# Altium PCB 1_ir-tara-f.PcbDoc (part 8 of 8)
Units mm, origin at the board's own origin, x right, y up, seen from the top; angles counter-clockwise.
Board outline 151 x 86.38 mm, 2 copper layers (Top Layer, Bottom Layer); 728 components, 20 nets, 2100 pads, 0 vias.
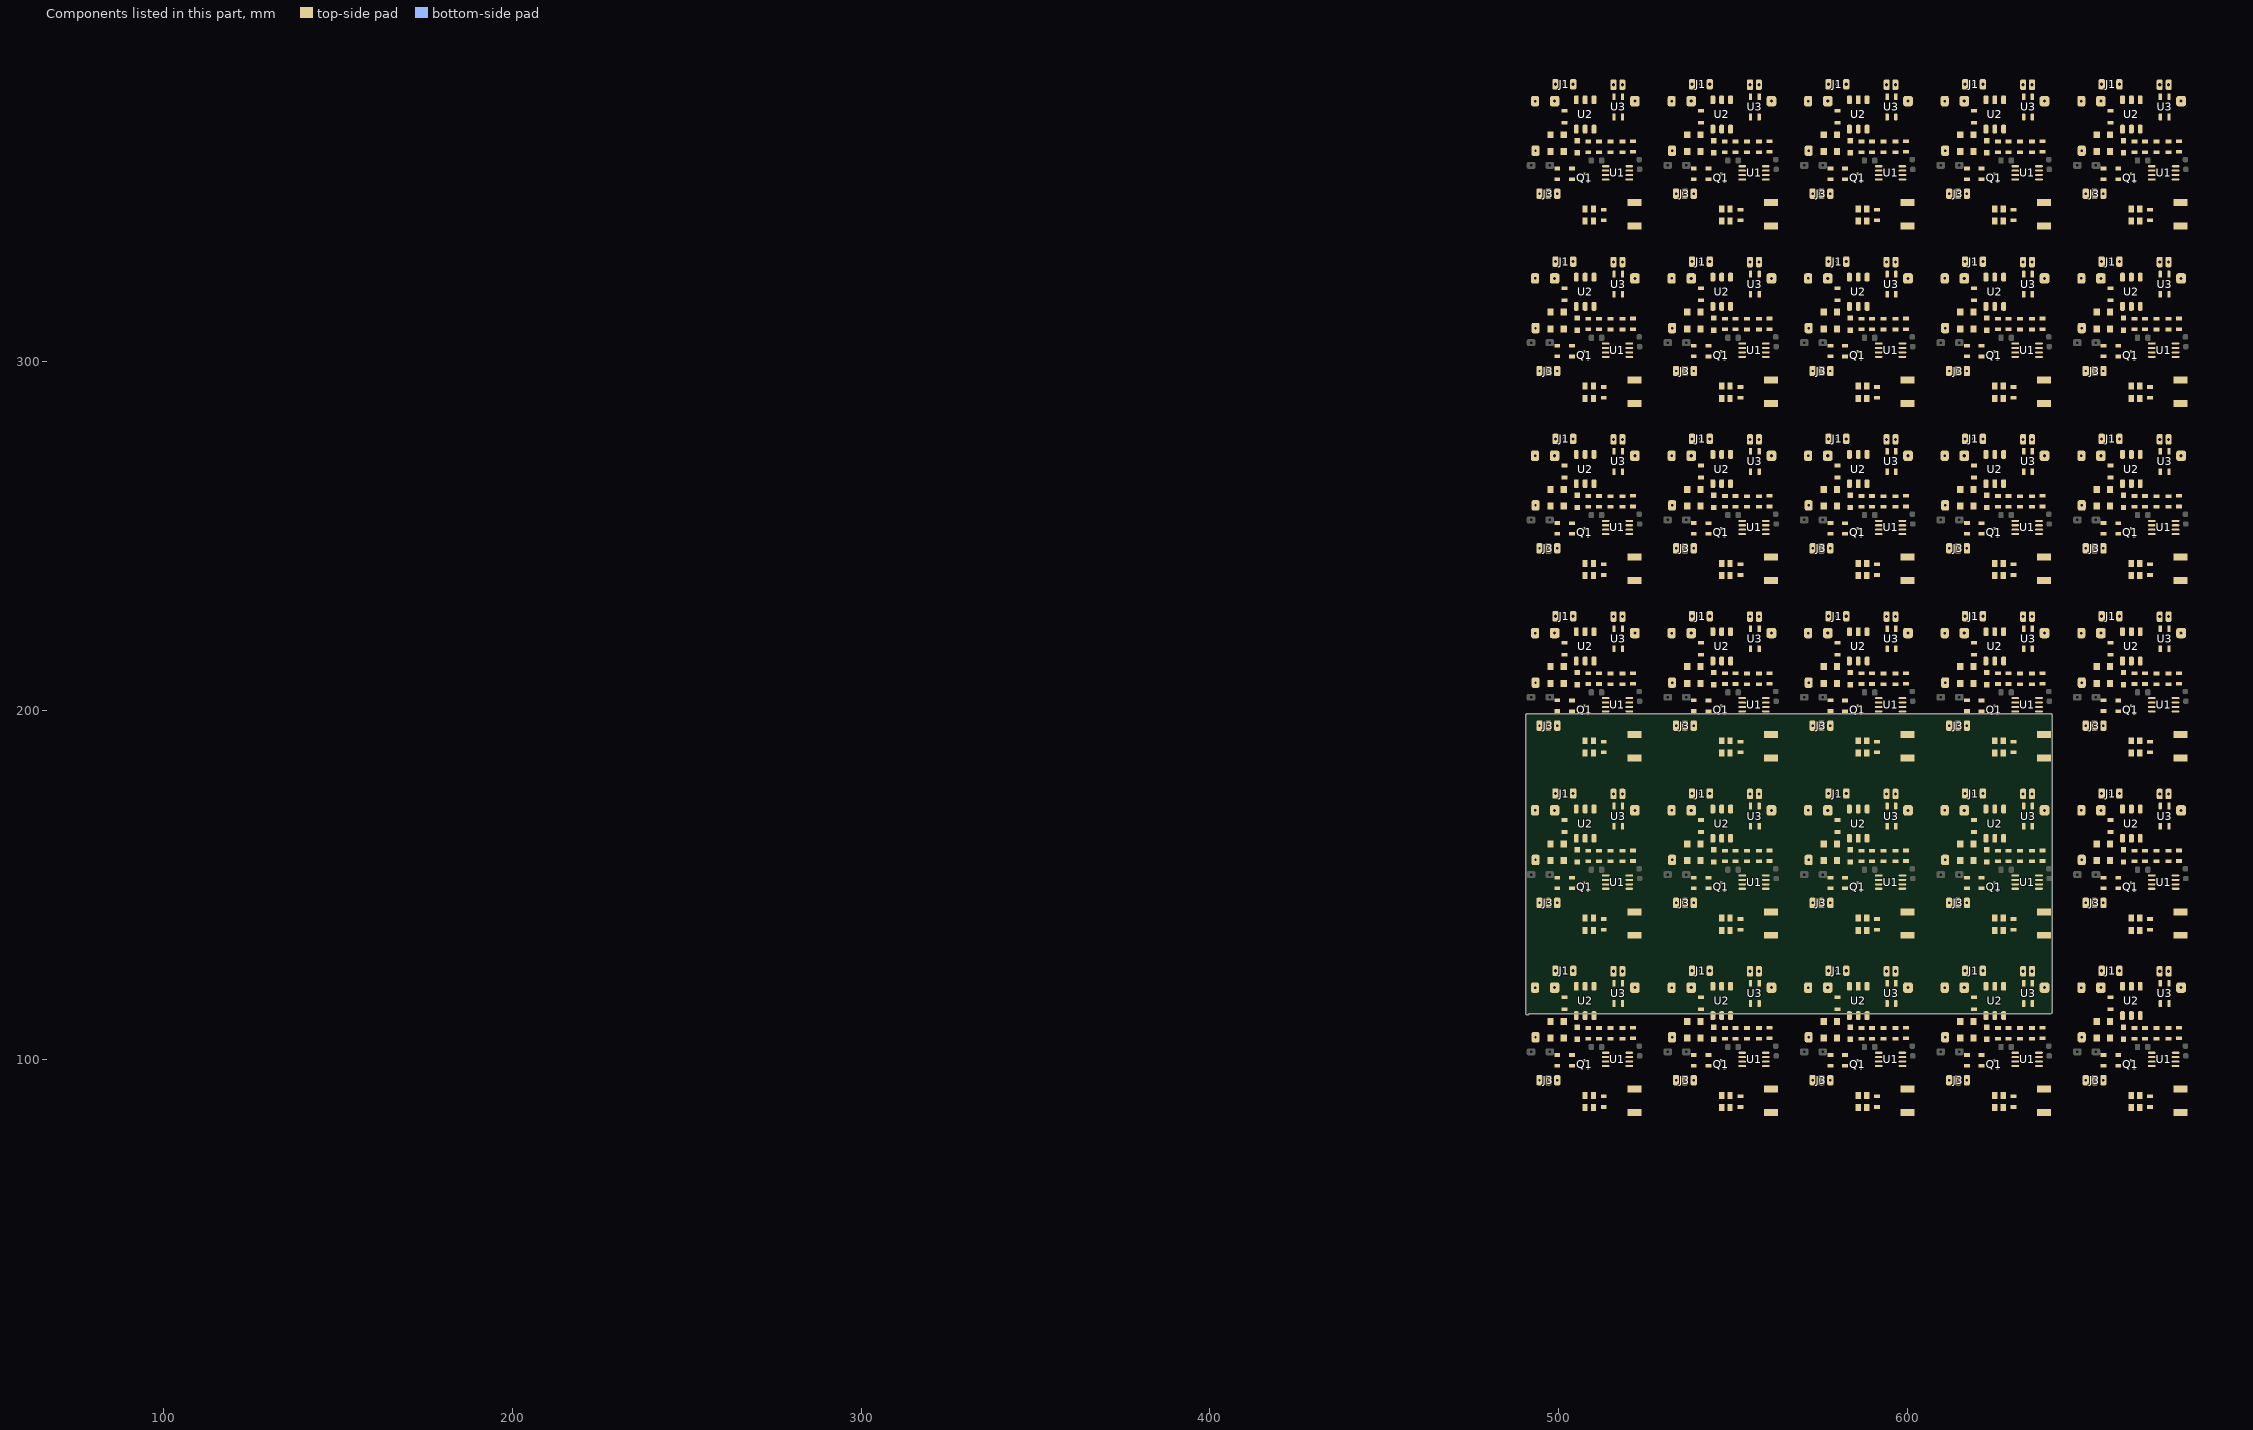
[diagram p8: the components of this part, seen from the top]

## Keep-outs
Keep-Out Layer:
  lines w0.3: 489.173,82.742 489.173,79.821 492.094,79.821 ; 489.173,127.192 489.173,130.113 492.094,130.113 ; 489.173,133.58 489.173,130.659 492.094,130.659 ; 489.173,178.03 489.173,180.951 492.094,180.951 ; 489.173,184.419 489.173,181.498 492.094,181.498 ; 489.173,228.869 489.173,231.79 492.094,231.79 ; 489.173,235.258 489.173,232.337 492.094,232.337 ; 489.173,279.708 489.173,282.629 492.094,282.629 ; 489.173,286.096 489.173,283.175 492.094,283.175 ; 489.173,330.546 489.173,333.467 492.094,333.467 ; 489.173,336.935 489.173,334.014 492.094,334.014 ; 489.173,381.385 489.173,384.306 492.094,384.306 ; 524.86,79.821 527.781,79.821 527.781,82.742 ; 524.86,384.306 527.781,384.306 527.781,381.385 ; 528.327,82.742 528.327,79.821 531.248,79.821 ; 528.327,381.385 528.327,384.306 531.248,384.306 ; 564.014,79.821 566.935,79.821 566.935,82.742 ; 564.014,384.306 566.935,384.306 566.935,381.385 ; 567.482,82.742 567.482,79.821 570.403,79.821 ; 567.482,381.385 567.482,384.306 570.403,384.306 ; 603.169,79.821 606.09,79.821 606.09,82.742 ; 603.169,384.306 606.09,384.306 606.09,381.385 ; 606.637,82.742 606.637,79.821 609.558,79.821 ; 606.637,381.385 606.637,384.306 609.558,384.306 ; 642.324,79.821 645.245,79.821 645.245,82.742 ; 642.324,384.306 645.245,384.306 645.245,381.385 ; 645.791,82.742 645.791,79.821 648.712,79.821 ; 645.791,381.385 645.791,384.306 648.712,384.306 ; 681.478,79.821 684.399,79.821 684.399,82.742 ; 681.478,130.113 684.399,130.113 684.399,127.192 ; 681.478,130.659 684.399,130.659 684.399,133.58 ; 681.478,180.951 684.399,180.951 684.399,178.03 ; 681.478,181.498 684.399,181.498 684.399,184.419 ; 681.478,231.79 684.399,231.79 684.399,228.869 ; 681.478,232.337 684.399,232.337 684.399,235.258 ; 681.478,282.629 684.399,282.629 684.399,279.708 ; 681.478,283.175 684.399,283.175 684.399,286.096 ; 681.478,333.467 684.399,333.467 684.399,330.546 ; 681.478,334.014 684.399,334.014 684.399,336.935 ; 681.478,384.306 684.399,384.306 684.399,381.385
  text "CHAHARDOLI-20 SERI-GHERMEZ TOP----MESHKI BOT VA GHETE BOT" at 560.272,385.545 h1.4
  text "CHAHARDOLI-20 SERI-GHERMEZ TOP----MESHKI BOT VA GHETE BOT" at 486.877,281.827 h1.4 r270
  text "CHAHARDOLI-20 SERI-GHERMEZ TOP----MESHKI BOT VA GHETE BOT" at 552.896,77.669 h1.4

## Other copper
Top Layer:
  pour cut-out: 598.47,345.063 601.645,345.063 601.645,339.602 601.518,339.729 598.47,339.729
  region: 575.991,360.339 577.805,358.525 579.42,358.525 579.547,358.398 578.277,357.128 578.277,355.604 577.896,355.223 577.769,355.35 574.213,355.35 574.213,357.509 572.435,359.287 572.435,360.297
  region: 615.146,360.339 616.96,358.525 618.575,358.525 618.702,358.398 617.432,357.128 617.432,355.604 617.051,355.223 616.924,355.35 613.368,355.35 613.368,357.509 611.59,359.287 611.59,360.297
  pour cut-out: 637.625,345.063 640.8,345.063 640.8,339.602 640.673,339.729 637.625,339.729
  region: 536.836,360.339 538.65,358.525 540.265,358.525 540.392,358.398 539.122,357.128 539.122,355.604 538.741,355.223 538.614,355.35 535.058,355.35 535.058,357.509 533.28,359.287 533.28,360.297
  pour cut-out: 559.315,345.063 562.49,345.063 562.49,339.602 562.363,339.729 559.315,339.729
  region: 497.682,360.339 499.496,358.525 501.111,358.525 501.238,358.398 499.968,357.128 499.968,355.604 499.587,355.223 499.46,355.35 495.904,355.35 495.904,357.509 494.126,359.287 494.126,360.297
  pour cut-out: 520.161,345.063 523.336,345.063 523.336,339.602 523.209,339.729 520.161,339.729
  region: 654.3,360.339 656.114,358.525 657.729,358.525 657.856,358.398 656.586,357.128 656.586,355.604 656.205,355.223 656.078,355.35 652.522,355.35 652.522,357.509 650.744,359.287 650.744,360.297
  pour cut-out: 676.779,345.063 679.954,345.063 679.954,339.602 679.827,339.729 676.779,339.729
  pour cut-out: 598.47,294.224 601.645,294.224 601.645,288.763 601.518,288.89 598.47,288.89
  region: 575.991,309.5 577.805,307.686 579.42,307.686 579.547,307.559 578.277,306.289 578.277,304.765 577.896,304.384 577.769,304.511 574.213,304.511 574.213,306.67 572.435,308.448 572.435,309.458
  region: 615.146,309.5 616.96,307.686 618.575,307.686 618.702,307.559 617.432,306.289 617.432,304.765 617.051,304.384 616.924,304.511 613.368,304.511 613.368,306.67 611.59,308.448 611.59,309.458
  pour cut-out: 637.625,294.224 640.8,294.224 640.8,288.763 640.673,288.89 637.625,288.89
  region: 536.836,309.5 538.65,307.686 540.265,307.686 540.392,307.559 539.122,306.289 539.122,304.765 538.741,304.384 538.614,304.511 535.058,304.511 535.058,306.67 533.28,308.448 533.28,309.458
  pour cut-out: 559.315,294.224 562.49,294.224 562.49,288.763 562.363,288.89 559.315,288.89
  region: 497.682,309.5 499.496,307.686 501.111,307.686 501.238,307.559 499.968,306.289 499.968,304.765 499.587,304.384 499.46,304.511 495.904,304.511 495.904,306.67 494.126,308.448 494.126,309.458
  pour cut-out: 520.161,294.224 523.336,294.224 523.336,288.763 523.209,288.89 520.161,288.89
  region: 654.3,309.5 656.114,307.686 657.729,307.686 657.856,307.559 656.586,306.289 656.586,304.765 656.205,304.384 656.078,304.511 652.522,304.511 652.522,306.67 650.744,308.448 650.744,309.458
  pour cut-out: 676.779,294.224 679.954,294.224 679.954,288.763 679.827,288.89 676.779,288.89
  pour cut-out: 598.47,243.386 601.645,243.386 601.645,237.925 601.518,238.052 598.47,238.052
  region: 575.991,258.662 577.805,256.848 579.42,256.848 579.547,256.721 578.277,255.451 578.277,253.927 577.896,253.546 577.769,253.673 574.213,253.673 574.213,255.832 572.435,257.61 572.435,258.62
  region: 615.146,258.662 616.96,256.848 618.575,256.848 618.702,256.721 617.432,255.451 617.432,253.927 617.051,253.546 616.924,253.673 613.368,253.673 613.368,255.832 611.59,257.61 611.59,258.62
  pour cut-out: 637.625,243.386 640.8,243.386 640.8,237.925 640.673,238.052 637.625,238.052
  region: 536.836,258.662 538.65,256.848 540.265,256.848 540.392,256.721 539.122,255.451 539.122,253.927 538.741,253.546 538.614,253.673 535.058,253.673 535.058,255.832 533.28,257.61 533.28,258.62
  pour cut-out: 559.315,243.386 562.49,243.386 562.49,237.925 562.363,238.052 559.315,238.052
  region: 497.682,258.662 499.496,256.848 501.111,256.848 501.238,256.721 499.968,255.451 499.968,253.927 499.587,253.546 499.46,253.673 495.904,253.673 495.904,255.832 494.126,257.61 494.126,258.62
  pour cut-out: 520.161,243.386 523.336,243.386 523.336,237.925 523.209,238.052 520.161,238.052
  region: 654.3,258.662 656.114,256.848 657.729,256.848 657.856,256.721 656.586,255.451 656.586,253.927 656.205,253.546 656.078,253.673 652.522,253.673 652.522,255.832 650.744,257.61 650.744,258.62
  pour cut-out: 676.779,243.386 679.954,243.386 679.954,237.925 679.827,238.052 676.779,238.052
  pour cut-out: 598.47,90.87 601.645,90.87 601.645,85.409 601.518,85.536 598.47,85.536
  region: 575.991,106.146 577.805,104.332 579.42,104.332 579.547,104.205 578.277,102.935 578.277,101.411 577.896,101.03 577.769,101.157 574.213,101.157 574.213,103.316 572.435,105.094 572.435,106.104
  region: 615.146,106.146 616.96,104.332 618.575,104.332 618.702,104.205 617.432,102.935 617.432,101.411 617.051,101.03 616.924,101.157 613.368,101.157 613.368,103.316 611.59,105.094 611.59,106.104
  pour cut-out: 637.625,90.87 640.8,90.87 640.8,85.409 640.673,85.536 637.625,85.536
  region: 536.836,106.146 538.65,104.332 540.265,104.332 540.392,104.205 539.122,102.935 539.122,101.411 538.741,101.03 538.614,101.157 535.058,101.157 535.058,103.316 533.28,105.094 533.28,106.104
  pour cut-out: 559.315,90.87 562.49,90.87 562.49,85.409 562.363,85.536 559.315,85.536
  region: 497.682,106.146 499.496,104.332 501.111,104.332 501.238,104.205 499.968,102.935 499.968,101.411 499.587,101.03 499.46,101.157 495.904,101.157 495.904,103.316 494.126,105.094 494.126,106.104
  pour cut-out: 520.161,90.87 523.336,90.87 523.336,85.409 523.209,85.536 520.161,85.536
  region: 654.3,106.146 656.114,104.332 657.729,104.332 657.856,104.205 656.586,102.935 656.586,101.411 656.205,101.03 656.078,101.157 652.522,101.157 652.522,103.316 650.744,105.094 650.744,106.104
  pour cut-out: 676.779,90.87 679.954,90.87 679.954,85.409 679.827,85.536 676.779,85.536
  pour cut-out: 598.47,192.547 601.645,192.547 601.645,187.086 601.518,187.213 598.47,187.213
  region: 575.991,207.823 577.805,206.009 579.42,206.009 579.547,205.882 578.277,204.612 578.277,203.088 577.896,202.707 577.769,202.834 574.213,202.834 574.213,204.993 572.435,206.771 572.435,207.781
  region: 615.146,207.823 616.96,206.009 618.575,206.009 618.702,205.882 617.432,204.612 617.432,203.088 617.051,202.707 616.924,202.834 613.368,202.834 613.368,204.993 611.59,206.771 611.59,207.781
  pour cut-out: 637.625,192.547 640.8,192.547 640.8,187.086 640.673,187.213 637.625,187.213
  region: 536.836,207.823 538.65,206.009 540.265,206.009 540.392,205.882 539.122,204.612 539.122,203.088 538.741,202.707 538.614,202.834 535.058,202.834 535.058,204.993 533.28,206.771 533.28,207.781
  pour cut-out: 559.315,192.547 562.49,192.547 562.49,187.086 562.363,187.213 559.315,187.213
  region: 497.682,207.823 499.496,206.009 501.111,206.009 501.238,205.882 499.968,204.612 499.968,203.088 499.587,202.707 499.46,202.834 495.904,202.834 495.904,204.993 494.126,206.771 494.126,207.781
  pour cut-out: 520.161,192.547 523.336,192.547 523.336,187.086 523.209,187.213 520.161,187.213
  region: 654.3,207.823 656.114,206.009 657.729,206.009 657.856,205.882 656.586,204.612 656.586,203.088 656.205,202.707 656.078,202.834 652.522,202.834 652.522,204.993 650.744,206.771 650.744,207.781
  pour cut-out: 676.779,192.547 679.954,192.547 679.954,187.086 679.827,187.213 676.779,187.213
  pour cut-out: 676.779,141.708 679.954,141.708 679.954,136.247 679.827,136.374 676.779,136.374
  region: 654.3,156.984 656.114,155.17 657.729,155.17 657.856,155.043 656.586,153.773 656.586,152.249 656.205,151.868 656.078,151.995 652.522,151.995 652.522,154.154 650.744,155.932 650.744,156.942
  pour cut-out: 520.161,141.708 523.336,141.708 523.336,136.247 523.209,136.374 520.161,136.374
  region: 497.682,156.984 499.496,155.17 501.111,155.17 501.238,155.043 499.968,153.773 499.968,152.249 499.587,151.868 499.46,151.995 495.904,151.995 495.904,154.154 494.126,155.932 494.126,156.942
  pour cut-out: 559.315,141.708 562.49,141.708 562.49,136.247 562.363,136.374 559.315,136.374
  region: 536.836,156.984 538.65,155.17 540.265,155.17 540.392,155.043 539.122,153.773 539.122,152.249 538.741,151.868 538.614,151.995 535.058,151.995 535.058,154.154 533.28,155.932 533.28,156.942
  pour cut-out: 637.625,141.708 640.8,141.708 640.8,136.247 640.673,136.374 637.625,136.374
  region: 615.146,156.984 616.96,155.17 618.575,155.17 618.702,155.043 617.432,153.773 617.432,152.249 617.051,151.868 616.924,151.995 613.368,151.995 613.368,154.154 611.59,155.932 611.59,156.942
  region net vcc: 575.991,156.984 577.805,155.17 579.42,155.17 579.547,155.043 578.277,153.773 578.277,152.249 577.896,151.868 577.769,151.995 574.213,151.995 574.213,154.154 572.435,155.932 572.435,156.942
  pour cut-out: 598.47,141.708 601.645,141.708 601.645,136.247 601.518,136.374 598.47,136.374
  text "T16505" at 640.815,386.046 h1.4
  text "T16505" at 529.539,385.727 h1.4
  text "Smart_Sperlus" at 526.13,366.78 h1.3 r90
  text "Smart_Sperlus" at 565.284,366.78 h1.3 r90
  text "Smart_Sperlus" at 604.439,366.78 h1.3 r90
  text "Smart_Sperlus" at 643.594,366.78 h1.3 r90
  text "Smart_Sperlus" at 682.748,366.78 h1.3 r90
  text "Smart_Sperlus" at 526.13,315.941 h1.3 r90
  text "Smart_Sperlus" at 565.284,315.941 h1.3 r90
  text "Smart_Sperlus" at 604.439,315.941 h1.3 r90
  text "Smart_Sperlus" at 643.594,315.941 h1.3 r90
  text "Smart_Sperlus" at 682.748,315.941 h1.3 r90
  text "Smart_Sperlus" at 526.13,265.103 h1.3 r90
  text "Smart_Sperlus" at 565.284,265.103 h1.3 r90
  text "Smart_Sperlus" at 604.439,265.103 h1.3 r90
  text "Smart_Sperlus" at 643.594,265.103 h1.3 r90
  text "Smart_Sperlus" at 682.748,265.103 h1.3 r90
  text "Smart_Sperlus" at 526.13,214.264 h1.3 r90
  text "Smart_Sperlus" at 565.284,214.264 h1.3 r90
  text "Smart_Sperlus" at 604.439,214.264 h1.3 r90
  text "Smart_Sperlus" at 643.594,214.264 h1.3 r90
  text "Smart_Sperlus" at 682.748,214.264 h1.3 r90
  text "Smart_Sperlus" at 526.13,163.425 h1.3 r90
  text "Smart_Sperlus" at 565.284,163.425 h1.3 r90
  text "Smart_Sperlus" at 604.439,163.425 h1.3 r90
  text "Smart_Sperlus" at 643.594,163.425 h1.3 r90
  text "Smart_Sperlus" at 682.748,163.425 h1.3 r90
  text "Smart_Sperlus" at 526.13,112.587 h1.3 r90
  text "Smart_Sperlus" at 565.284,112.587 h1.3 r90
  text "Smart_Sperlus" at 604.439,112.587 h1.3 r90
  text "Smart_Sperlus" at 643.594,112.587 h1.3 r90
  text "Smart_Sperlus" at 682.748,112.587 h1.3 r90
Multi-Layer:
  lines w0.3: 483.684,384.616 488.734,384.616 ; 483.876,79.627 488.926,79.627 ; 488.834,384.566 488.834,389.616 ; 488.876,74.477 488.876,79.527 ; 684.638,384.566 689.688,384.566 ; 684.688,384.666 684.688,389.716 ; 684.752,74.486 684.752,79.536 ; 684.852,79.486 689.902,79.486

## Silkscreen, mask and mechanical layers (free items; w line width, h text height)
Bottom Overlay:
  text "CHAHARDOLI-20 SERI-GHERMEZ TOP----MESHKI BOT VA GHETE BOT" at 624.105,385.545 h1.4
Top Solder:
  rectangle: 602.534,363.605 605.328,383.417
  rectangle: 641.689,363.605 644.483,383.417
  rectangle: 563.379,363.605 566.173,383.417
  rectangle: 524.225,363.605 527.019,383.417
  rectangle: 680.843,363.605 683.637,383.417
  rectangle: 602.534,312.766 605.328,332.578
  rectangle: 641.689,312.766 644.483,332.578
  rectangle: 563.379,312.766 566.173,332.578
  rectangle: 524.225,312.766 527.019,332.578
  rectangle: 680.843,312.766 683.637,332.578
  rectangle: 602.534,261.928 605.328,281.74
  rectangle: 641.689,261.928 644.483,281.74
  rectangle: 563.379,261.928 566.173,281.74
  rectangle: 524.225,261.928 527.019,281.74
  rectangle: 680.843,261.928 683.637,281.74
  rectangle: 602.534,109.412 605.328,129.224
  rectangle: 641.689,109.412 644.483,129.224
  rectangle: 563.379,109.412 566.173,129.224
  rectangle: 524.225,109.412 527.019,129.224
  rectangle: 680.843,109.412 683.637,129.224
  rectangle: 602.534,211.089 605.328,230.901
  rectangle: 641.689,211.089 644.483,230.901
  rectangle: 563.379,211.089 566.173,230.901
  rectangle: 524.225,211.089 527.019,230.901
  rectangle: 680.843,211.089 683.637,230.901
  rectangle: 680.843,160.25 683.637,180.062
  rectangle: 524.225,160.25 527.019,180.062
  rectangle: 563.379,160.25 566.173,180.062
  rectangle: 641.689,160.25 644.483,180.062
  rectangle: 602.534,160.25 605.328,180.062
  lines w0.254: 524.352,109.539 526.892,109.539 526.892,129.097 524.352,129.097 524.352,109.539 ; 524.352,160.377 524.352,179.935 526.892,179.935 526.892,160.377 524.352,160.377 ; 524.352,211.216 526.892,211.216 526.892,230.774 524.352,230.774 524.352,211.216 ; 524.352,262.055 526.892,262.055 526.892,281.613 524.352,281.613 524.352,262.055 ; 524.352,312.893 526.892,312.893 526.892,332.451 524.352,332.451 524.352,312.893 ; 524.352,363.732 526.892,363.732 526.892,383.29 524.352,383.29 524.352,363.732 ; 563.506,109.539 566.046,109.539 566.046,129.097 563.506,129.097 563.506,109.539 ; 563.506,160.377 563.506,179.935 566.046,179.935 566.046,160.377 563.506,160.377 ; 563.506,211.216 566.046,211.216 566.046,230.774 563.506,230.774 563.506,211.216 ; 563.506,262.055 566.046,262.055 566.046,281.613 563.506,281.613 563.506,262.055 ; 563.506,312.893 566.046,312.893 566.046,332.451 563.506,332.451 563.506,312.893 ; 563.506,363.732 566.046,363.732 566.046,383.29 563.506,383.29 563.506,363.732 ; 602.661,109.539 602.661,129.097 605.201,129.097 605.201,109.539 602.661,109.539 ; 602.661,160.377 605.201,160.377 605.201,179.935 602.661,179.935 602.661,160.377 ; 602.661,211.216 602.661,230.774 605.201,230.774 605.201,211.216 602.661,211.216 ; 602.661,262.055 602.661,281.613 605.201,281.613 605.201,262.055 602.661,262.055 ; 602.661,312.893 602.661,332.451 605.201,332.451 605.201,312.893 602.661,312.893 ; 602.661,363.732 602.661,383.29 605.201,383.29 605.201,363.732 602.661,363.732 ; 641.816,109.539 644.356,109.539 644.356,129.097 641.816,129.097 641.816,109.539 ; 641.816,160.377 641.816,179.935 644.356,179.935 644.356,160.377 641.816,160.377 ; 641.816,211.216 644.356,211.216 644.356,230.774 641.816,230.774 641.816,211.216 ; 641.816,262.055 644.356,262.055 644.356,281.613 641.816,281.613 641.816,262.055 ; 641.816,312.893 644.356,312.893 644.356,332.451 641.816,332.451 641.816,312.893 ; 641.816,363.732 644.356,363.732 644.356,383.29 641.816,383.29 641.816,363.732 ; 680.97,109.539 683.51,109.539 683.51,129.097 680.97,129.097 680.97,109.539 ; 680.97,160.377 680.97,179.935 683.51,179.935 683.51,160.377 680.97,160.377 ; 680.97,211.216 683.51,211.216 683.51,230.774 680.97,230.774 680.97,211.216 ; 680.97,262.055 683.51,262.055 683.51,281.613 680.97,281.613 680.97,262.055 ; 680.97,312.893 683.51,312.893 683.51,332.451 680.97,332.451 680.97,312.893 ; 680.97,363.732 683.51,363.732 683.51,383.29 680.97,383.29 680.97,363.732
  text "TOP" at 650.513,385.966 h2.5
  text "TOP" at 487.434,350.441 h2.5 r90
  text "TOP" at 686.152,113.661 h2.5 r270
  text "TOP" at 523.051,78.227 h2.5 r180
Bottom Solder:
  text "BOT" at 524.309,386.216 h2.5
  text "BOT" at 686.288,349.091 h2.5 r270
  text "BOT" at 487.276,115.102 h2.5 r90
  text "BOT" at 649.277,77.886 h2.5 r180

## Text inside footprints (layer, text, board x,y; h text height)
Designator95_2: Top Layer "TOPR" at 489.212,385.749 h2.5; Bottom Layer "BOTR" at 507.512,388.849 h2.5 r180
Designator95_2: Top Layer "TOP" at 484.867,384.238 h3 r270; Bottom Layer "BOT" at 487.967,365.938 h3 r90
Designator95_2: Top Layer "TOPR" at 685.821,384.188 h2.5 r270; Bottom Layer "BOTR" at 688.921,365.888 h2.5 r90
Designator95_2: Top Layer "TOP" at 684.31,388.533 h3 r180; Bottom Layer "BOT" at 666.01,385.433 h3
Designator95_2: Top Layer "TOPR" at 684.374,78.353 h2.5 r180; Bottom Layer "BOTR" at 666.074,75.253 h2.5
Designator95_2: Top Layer "TOP" at 688.719,79.864 h3 r90; Bottom Layer "BOT" at 685.619,98.164 h3 r270
Designator95_2: Top Layer "TOPR" at 487.743,80.005 h2.5 r90; Bottom Layer "BOTR" at 484.643,98.305 h2.5 r270
Designator95_2: Top Layer "TOP" at 489.254,75.66 h3; Bottom Layer "BOT" at 507.554,78.76 h3 r180
U3: Top Overlay "-" at 594.022,374.529 h0.81 r270; Top Overlay "+" at 596.312,374.529 h0.81 r270
U3: Top Overlay "+" at 635.467,374.529 h0.81 r270; Top Overlay "-" at 633.177,374.529 h0.81 r270
U3: Top Overlay "-" at 554.868,374.529 h0.81 r270; Top Overlay "+" at 557.158,374.529 h0.81 r270
U3: Top Overlay "-" at 515.713,374.529 h0.81 r270; Top Overlay "+" at 518.003,374.529 h0.81 r270
U3: Top Overlay "-" at 672.332,374.529 h0.81 r270; Top Overlay "+" at 674.621,374.529 h0.81 r270
U3: Top Overlay "-" at 594.022,323.691 h0.81 r270; Top Overlay "+" at 596.312,323.69 h0.81 r270
U3: Top Overlay "+" at 635.467,323.69 h0.81 r270; Top Overlay "-" at 633.177,323.691 h0.81 r270
U3: Top Overlay "-" at 554.868,323.691 h0.81 r270; Top Overlay "+" at 557.158,323.69 h0.81 r270
U3: Top Overlay "-" at 515.713,323.691 h0.81 r270; Top Overlay "+" at 518.003,323.69 h0.81 r270
U3: Top Overlay "-" at 672.332,323.691 h0.81 r270; Top Overlay "+" at 674.621,323.69 h0.81 r270
U3: Top Overlay "-" at 594.022,272.852 h0.81 r270; Top Overlay "+" at 596.312,272.851 h0.81 r270
U3: Top Overlay "+" at 635.467,272.851 h0.81 r270; Top Overlay "-" at 633.177,272.852 h0.81 r270
U3: Top Overlay "-" at 554.868,272.852 h0.81 r270; Top Overlay "+" at 557.158,272.851 h0.81 r270
U3: Top Overlay "-" at 515.713,272.852 h0.81 r270; Top Overlay "+" at 518.003,272.851 h0.81 r270
U3: Top Overlay "-" at 672.332,272.852 h0.81 r270; Top Overlay "+" at 674.621,272.851 h0.81 r270
U3: Top Overlay "-" at 594.023,120.336 h0.81 r270; Top Overlay "+" at 596.312,120.336 h0.81 r270
U3: Top Overlay "+" at 635.467,120.336 h0.81 r270; Top Overlay "-" at 633.177,120.336 h0.81 r270
U3: Top Overlay "-" at 554.868,120.336 h0.81 r270; Top Overlay "+" at 557.158,120.336 h0.81 r270
U3: Top Overlay "-" at 515.713,120.336 h0.81 r270; Top Overlay "+" at 518.003,120.336 h0.81 r270
U3: Top Overlay "-" at 672.332,120.336 h0.81 r270; Top Overlay "+" at 674.621,120.336 h0.81 r270
U3: Top Overlay "-" at 594.022,222.014 h0.81 r270; Top Overlay "+" at 596.312,222.013 h0.81 r270
U3: Top Overlay "+" at 635.467,222.013 h0.81 r270; Top Overlay "-" at 633.177,222.014 h0.81 r270
U3: Top Overlay "-" at 554.868,222.014 h0.81 r270; Top Overlay "+" at 557.158,222.013 h0.81 r270
U3: Top Overlay "-" at 515.713,222.014 h0.81 r270; Top Overlay "+" at 518.003,222.013 h0.81 r270
U3: Top Overlay "-" at 672.332,222.014 h0.81 r270; Top Overlay "+" at 674.621,222.013 h0.81 r270
U3: Top Overlay "-" at 672.332,171.175 h0.81 r270; Top Overlay "+" at 674.621,171.174 h0.81 r270
U3: Top Overlay "-" at 515.713,171.175 h0.81 r270; Top Overlay "+" at 518.003,171.174 h0.81 r270
U3: Top Overlay "-" at 554.868,171.175 h0.81 r270; Top Overlay "+" at 557.158,171.174 h0.81 r270
U3: Top Overlay "+" at 635.467,171.174 h0.81 r270; Top Overlay "-" at 633.177,171.175 h0.81 r270
U3: Top Overlay "-" at 594.023,171.175 h0.81 r270; Top Overlay "+" at 596.312,171.174 h0.81 r270